# EAGLE board Memory Board (EAGLE 7.4.0)
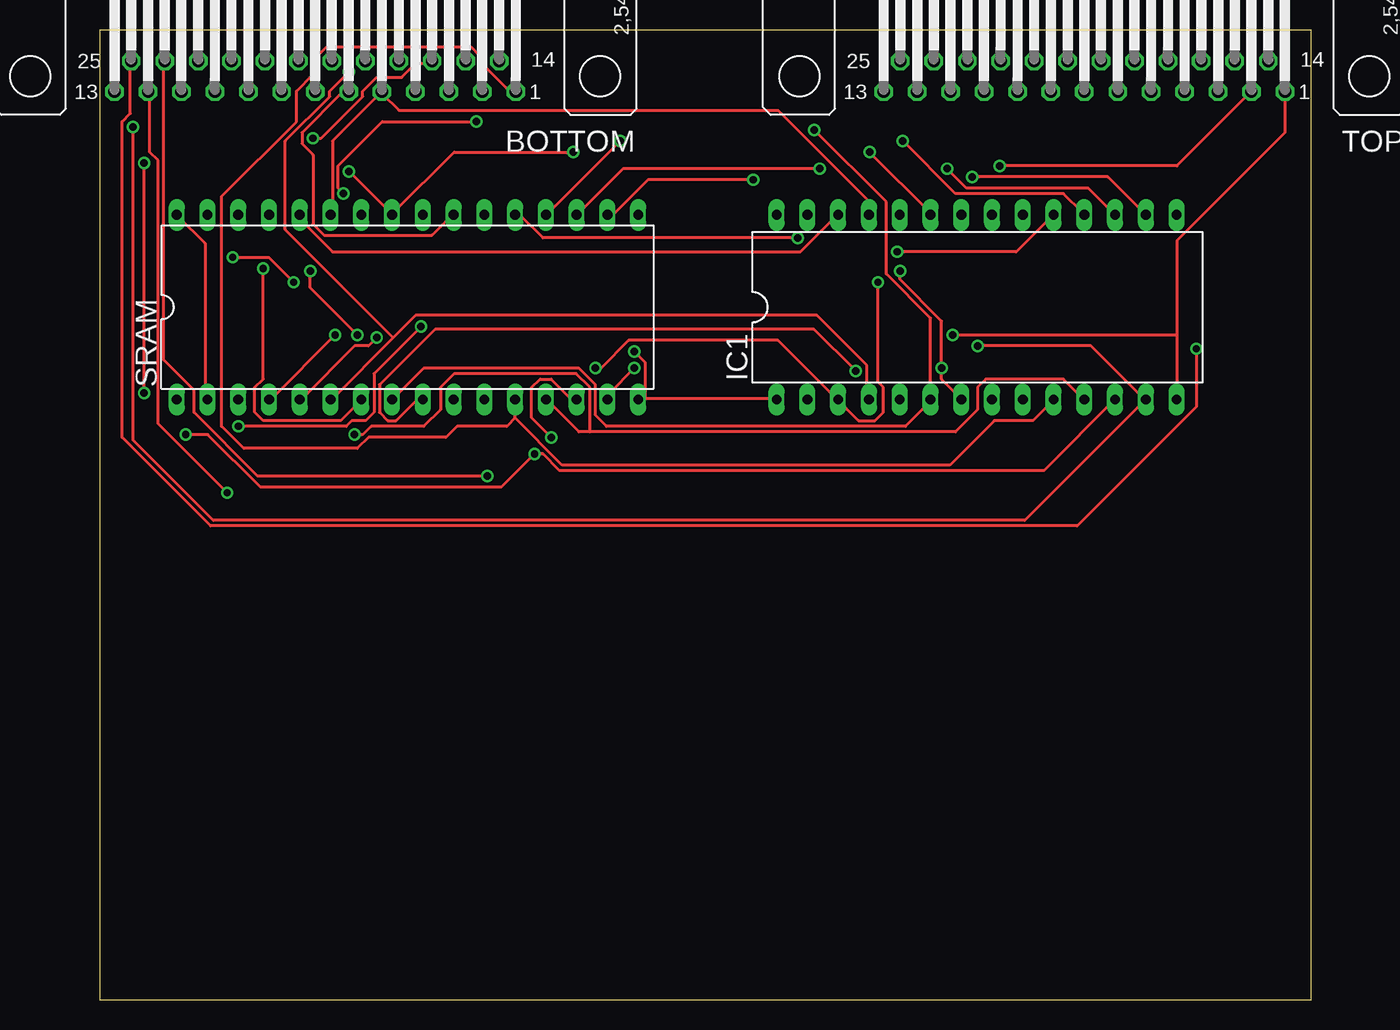
[diagram p0: board, top side]
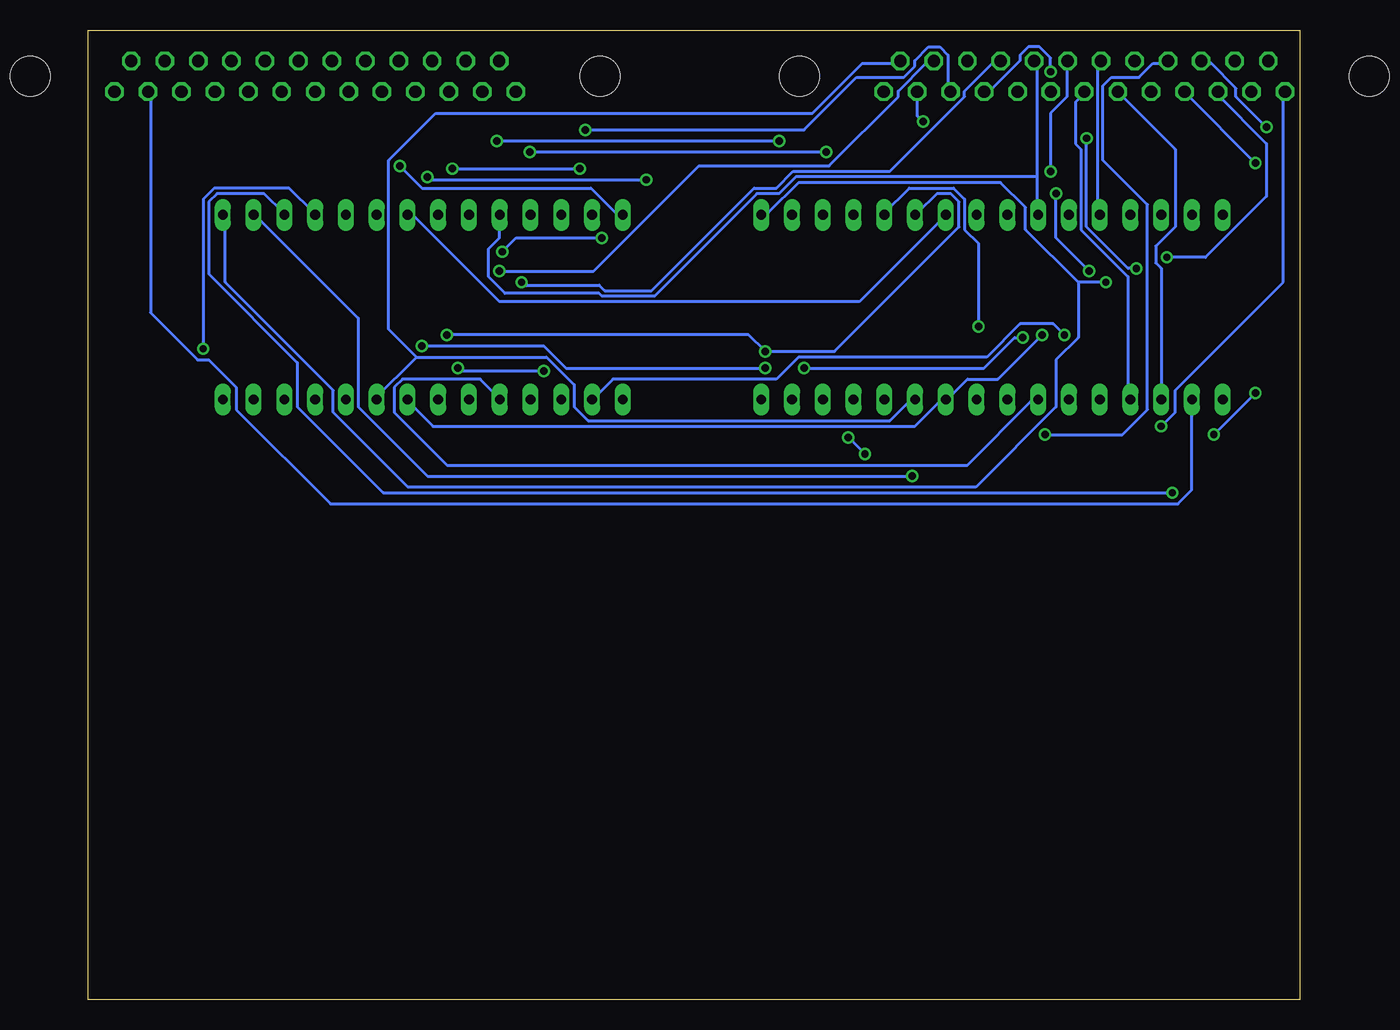
[diagram p1: board, bottom side, seen from below]

Size 100 x 80 mm. Coordinates in mm from the lower left corner, seen from the top.
Outline: 0,0 100,0 100,80 0,80 0,0
Copper layers (1*16): Top 0.035mm / dielectric 1.5mm / Bottom 0.035mm
Design rules "default": minimum track width 10mil, minimum drill 24mil, track to track 8mil, track to pad 8mil, pad to pad 8mil, via to via 8mil, smd to smd 8mil, copper to edge 40mil, drill to drill 8mil, minimum pad ring 10mil, minimum via ring 8mil, stop-mask expansion 4mil, vias tented up to drill 0mil, thermal gap 10mil

## Footprints (pad centres in the part's own frame; a part is rotated, then mirrored left to right if it is on the bottom)
M25H = drill 1.016 octagon: 1 -16.561,1.27; 2 -13.792,1.27; 3 -11.049,1.27; 4 -8.28,1.27; 5 -5.512,1.27; 6 -2.769,1.27; 7 0,1.27; 8 2.769,1.27; 9 5.512,1.27; 10 8.28,1.27; 11 11.049,1.27; 12 13.792,1.27; 13 16.561,1.27; 14 -15.189,-1.27; 15 -12.421,-1.27; 16 -9.652,-1.27; 17 -6.909,-1.27; 18 -4.14,-1.27; 19 -1.372,-1.27; 20 1.372,-1.27; 21 4.14,-1.27; 22 6.909,-1.27; 23 9.652,-1.27; 24 12.421,-1.27; 25 15.189,-1.27 | hole 3.302: 23.52,0; -23.52,0
DIL28-6 = drill 0.813 long: 1 -16.51,-7.62; 2 -13.97,-7.62; 3 -11.43,-7.62; 4 -8.89,-7.62; 5 -6.35,-7.62; 6 -3.81,-7.62; 7 -1.27,-7.62; 8 1.27,-7.62; 9 3.81,-7.62; 10 6.35,-7.62; 11 8.89,-7.62; 12 11.43,-7.62; 13 13.97,-7.62; 14 16.51,-7.62; 15 16.51,7.62; 16 13.97,7.62; 17 11.43,7.62; 18 8.89,7.62; 19 6.35,7.62; 20 3.81,7.62; 21 1.27,7.62; 22 -1.27,7.62; 23 -3.81,7.62; 24 -6.35,7.62; 25 -8.89,7.62; 26 -11.43,7.62; 27 -13.97,7.62; 28 -16.51,7.62
DIL32 = drill 0.813 long: 1 -19.05,-7.62; 2 -16.51,-7.62; 3 -13.97,-7.62; 4 -11.43,-7.62; 5 -8.89,-7.62; 6 -6.35,-7.62; 7 -3.81,-7.62; 8 -1.27,-7.62; 9 1.27,-7.62; 10 3.81,-7.62; 11 6.35,-7.62; 12 8.89,-7.62; 13 11.43,-7.62; 14 13.97,-7.62; 15 16.51,-7.62; 16 19.05,-7.62; 17 19.05,7.62; 18 16.51,7.62; 19 13.97,7.62; 20 11.43,7.62; 21 8.89,7.62; 22 6.35,7.62; 23 3.81,7.62; 24 1.27,7.62; 25 -1.27,7.62; 26 -3.81,7.62; 27 -6.35,7.62; 28 -8.89,7.62; 29 -11.43,7.62; 30 -13.97,7.62; 31 -16.51,7.62; 32 -19.05,7.62

## Placement (x,y rotation side)
BOTTOM  [M25H]  17.78,76.2 180 top
IC1  27C128P  [DIL28-6]  72.39,57.15 0 top
SRAM  [DIL32]  25.4,57.15 0 top
TOP  [M25H]  81.28,76.2 180 top

## Library data of the parts
BOTTOM TOP = con-subd; OC_FARNELL: unknown; OC_NEWARK: unknown
IC1 = microchip; OC_FARNELL: unknown; OC_NEWARK: unknown
SRAM = ic-package

## Nets
+5: IC1.28 SRAM.2 SRAM.32 TOP.2
+12: TOP.3
-5: TOP.15
-12: TOP.16
/IRQ0: TOP.4
/IRQ1: TOP.17
/MR: SRAM.24
/MW: SRAM.29
A0: BOTTOM.1 IC1.10 SRAM.12
A1: BOTTOM.14 IC1.9 SRAM.11
A2: BOTTOM.2 IC1.8 SRAM.10
A3: BOTTOM.15 IC1.7 SRAM.9
A4: BOTTOM.3 IC1.6 SRAM.8
A5: BOTTOM.16 IC1.5 SRAM.7
A6: BOTTOM.4 IC1.4 SRAM.6
A7: BOTTOM.17 IC1.3 SRAM.5
A8: BOTTOM.5 IC1.25 SRAM.27
A9: BOTTOM.18 IC1.24 SRAM.26
A10: BOTTOM.6 IC1.21 SRAM.23
A11: BOTTOM.19 IC1.23 SRAM.25
A12: BOTTOM.7 IC1.2 SRAM.4
A13: BOTTOM.20 IC1.26 SRAM.28
A14: BOTTOM.8 SRAM.3
A15: BOTTOM.21
CLK: TOP.14
D0: BOTTOM.22 IC1.11 SRAM.13
D1: BOTTOM.10 IC1.12 SRAM.14
D2: BOTTOM.23 IC1.13 SRAM.15
D3: BOTTOM.11 IC1.15 SRAM.17
D4: BOTTOM.24 IC1.16 SRAM.18
D5: BOTTOM.12 IC1.17 SRAM.19
D6: BOTTOM.25 IC1.18 SRAM.20
D7: BOTTOM.13 IC1.19 SRAM.21
DECODE_A15: SRAM.31
GND: IC1.1 IC1.14 SRAM.16 SRAM.22 TOP.1
N$16: SRAM.1
SRAM_CS2: SRAM.30

## Tracks (layer width: path | path; a pad name or v marks a point on that pad's centre or on a via)
+5  (via drill 0.61)
  Top 0.254: SRAM.2 8.69,49.61 8.69,62.41 6.4,64.69 SRAM.32 | v74.3,68.81 88.92,68.81 94.87,74.75 TOP.2
  Bottom 0.254: v74.3,68.81 72.47,66.98 58.52,66.98 56.46,64.92 56.01,64.92 IC1.28 | SRAM.2 8.91,49.38 8.91,42.06 10.06,40.92 80.01,40.92 87.78,48.69 87.78,50.52 90.07,52.81 90.98,52.81 94.87,56.69 94.87,74.75 TOP.2
A0
  Top 0.254: 34.29,48.01 SRAM.12 | 34.29,48.01 38.18,44.12 70.18,44.12 73.84,47.78 77.04,47.78 78.64,49.38 IC1.10 | 34.29,48.01 33.6,47.32 29.49,47.32 28.57,46.41 22.17,46.41 21.26,45.49 11.89,45.49 10.06,47.32 10.06,66.29 16.23,72.47 16.23,74.98 17.6,76.35 17.6,77.5 18.75,78.64 30.63,78.64 31.32,77.95 31.32,77.5 33.83,74.98 34.29,74.98 BOTTOM.1
A1
  Bottom 0.254: 72.92,53.03 62.18,53.03 59.89,50.75 59.89,48.92 58.75,47.78 33.83,47.78 32.23,49.38 31.77,49.38 SRAM.11 | 72.92,53.03 76.35,49.61 IC1.9 | 72.92,53.03 75.21,55.32 75.21,69.27 71.32,73.15 40.23,73.15 36.12,77.27 33.15,77.27 BOTTOM.14
A2  (via drill 0.61)
  Top 0.254: v31.09,72.47 23.32,72.47 19.66,68.81 19.66,66.98 v20.12,66.52 | v17.37,60.12 17.37,58.75 v21.26,54.86
  Bottom 0.254: IC1.8 73.61,49.38 71.55,47.32 31.77,47.32 29.72,49.38 29.26,49.38 SRAM.10 29.03,49.61 27.43,51.21 24.92,51.21 v21.26,54.86 | v31.09,72.47 31.55,72.92 31.55,74.75 BOTTOM.2 | v20.12,66.52 20.12,62.87 v17.37,60.12
A3  (via drill 0.61)
  Top 0.254: v62.41,51.89 58.98,55.32 27.66,55.32 23.09,50.75 23.09,48.46 23.77,47.78 24.46,47.78 26.06,49.38 26.52,49.38 SRAM.9 | IC1.7 71.09,49.61 69.49,51.21 v69.49,52.12 69.49,56.01 66.06,59.44 v66.06,60.12
  Bottom 0.254: v62.41,51.89 69.27,51.89 v69.49,52.12 | v66.06,60.12 58.29,60.12 49.61,68.81 38.86,68.81 33.15,74.52 33.15,74.98 30.86,77.27 30.4,77.27 BOTTOM.15
A4  (via drill 0.61)
  Top 0.254: SRAM.8 24.23,49.61 26.75,52.12 39.55,52.12 40.92,50.75 40.92,48.23 41.83,47.32 66.52,47.32 68.58,49.38 IC1.6 68.58,56.24 64.92,59.89 64.92,65.84 v58.98,71.78
  Bottom 0.254: v58.98,71.78 40.92,71.78 36.58,76.12 32.69,76.12 31.77,77.04 31.77,77.5 30.63,78.64 29.72,78.64 29.03,77.95 29.03,74.98 BOTTOM.3
A5  (via drill 0.61)
  Top 0.254: v17.6,71.09 18.29,71.09 21.72,74.52 21.72,74.98 22.86,76.12 24.92,76.12 26.06,77.27 27.43,77.27 BOTTOM.16 | v13.49,60.35 13.49,51.21 12.8,50.52 12.8,48.46 13.49,47.78 19.89,47.78 21.49,49.38 SRAM.7
  Bottom 0.254: SRAM.7 21.72,49.38 22.17,49.38 27.43,44.12 70.41,44.12 74.75,48.46 74.75,50.52 74.07,51.21 67.67,51.21 66.06,49.61 IC1.5 | v17.6,71.09 17.6,63.78 14.17,60.35 v13.49,60.35
A6  (via drill 0.61)
  Top 0.254: 24.23,54.63 26.06,56.46 59.21,56.46 63.32,52.35 63.32,49.61 IC1.4 | 24.23,54.63 19.2,49.61 SRAM.6 | v20.57,76.58 18.97,74.98 18.97,74.52 15.32,70.87 15.32,63.55 24.23,54.63
  Bottom 0.254: v20.57,76.58 20.57,77.72 21.49,78.64 22.4,78.64 23.09,77.95 23.09,77.5 25.6,74.98 26.06,74.98 BOTTOM.4
A7  (via drill 0.61)
  Top 0.254: v22.86,54.63 22.17,53.95 21.03,53.95 16.69,49.61 SRAM.5 | v40.92,52.12 41.38,52.12 43.66,54.41 56.01,54.41 60.81,49.61 IC1.3 61.04,49.38 62.64,47.78 64.01,47.78 64.69,48.46 64.69,50.52 64.24,50.98 v64.24,59.21
  Bottom 0.254: v22.86,54.63 23.55,54.63 26.06,52.12 v40.92,52.12 | v64.24,59.21 64.01,58.98 57.84,58.98 57.38,58.52 53.49,58.52 45.03,66.98 43.2,66.98 41.83,68.35 33.83,68.35 27.66,74.52 27.66,74.98 25.38,77.27 24.69,77.27 BOTTOM.17
A8
  Top 0.254: SRAM.27 19.2,64.92 19.2,70.87 23.09,74.75 BOTTOM.5 23.32,74.75 24.69,73.38 56.01,73.38 63.32,66.06 63.32,64.92 IC1.25
A9
  Bottom 0.254: 21.72,67.89 21.72,77.27 BOTTOM.18 | 21.72,67.89 21.72,64.92 SRAM.26 | 21.72,67.89 41.6,67.89 42.98,66.52 44.81,66.52 53.26,58.06 57.61,58.06 57.84,58.29 65.61,58.29 66.98,59.66 66.98,61.95 66.06,62.87 66.06,64.69 IC1.24
A10
  Top 0.254: SRAM.23 29.03,64.69 27.43,63.09 18.52,63.09 17.6,64.01 17.6,69.72 16.69,70.64 16.69,71.55 19.89,74.75 20.34,74.75 BOTTOM.6
  Bottom 0.254: IC1.21 73.61,64.69 73.15,64.69 66.06,57.61 36.35,57.61 29.26,64.69 SRAM.23
A11  (via drill 0.61)
  Top 0.254: v20.57,68.35 24,64.92 SRAM.25 24.23,64.92 29.26,69.95 v39.09,69.95 | v63.55,69.95 68.58,64.92 IC1.23
  Bottom 0.254: v20.57,68.35 20.57,73.15 19.2,74.52 19.2,77.27 BOTTOM.19 | v39.09,69.95 v63.55,69.95
A12  (via drill 0.61)
  Top 0.254: v19.43,54.86 14.17,49.61 SRAM.4
  Bottom 0.254: SRAM.4 14.17,49.61 14.17,59.66 18.06,63.55 18.06,70.18 18.52,70.64 18.52,74.07 17.83,74.75 BOTTOM.7 | v19.43,54.86 20.34,55.78 23.09,55.78 25.83,53.03 41.38,53.03 43.2,51.21 56.69,51.21 58.29,49.61 IC1.2
A13
  Top 0.254: IC1.26 60.81,64.69 57.84,61.72 19.2,61.72 16.69,64.24 16.69,64.69 SRAM.28
  Bottom 0.254: SRAM.28 16.69,64.92 16.69,77.04 16.46,77.27 BOTTOM.20
A14
  Bottom 0.254: SRAM.3 11.43,60.35 11.89,60.81 11.89,62.18 10.29,63.78 10.29,70.18 14.86,74.75 BOTTOM.8
D0  (via drill 0.61)
  Top 0.254: 40.46,46.86 70.64,46.86 72.47,48.69 72.47,50.52 73.15,51.21 79.55,51.21 81.15,49.61 IC1.11 | 40.46,46.86 39.55,46.86 37.03,49.38 SRAM.13 | v21.03,46.63 21.72,46.63 22.4,47.32 26.75,47.32 28.12,48.69 28.12,50.52 29.26,51.66 39.32,51.66 40.46,50.52 40.46,46.86
  Bottom 0.254: v21.03,46.63 14.63,46.63 12.57,48.69 12.57,65.61 16.23,69.27 16.23,75.44 15.54,76.12 13.26,76.12 12.12,77.27 10.97,77.27 BOTTOM.22
D1  (via drill 0.61)
  Top 0.254: v37.26,46.41 35.66,48.01 35.66,50.52 36.35,51.21 37.26,51.21 38.86,49.61 39.32,49.61 SRAM.14 | IC1.12 77.95,43.66 37.95,43.66 36.58,45.03 v35.89,45.03 33.15,42.29 13.26,42.29 8.91,46.63 v7.09,46.63 | v3.66,50.06 v3.66,69.04
  Bottom 0.254: v35.89,45.03 v37.26,46.41 | v3.66,69.04 9.37,74.75 BOTTOM.10 | v7.09,46.63 v3.66,50.06
D2  (via drill 0.61)
  Top 0.254: v44.12,52.12 42.06,50.06 42.06,49.61 SRAM.15 | v72.47,53.95 81.84,53.95 86.18,49.61 IC1.13 86.18,49.38 76.35,39.55 9.37,39.55 2.74,46.18 v2.74,72.01
  Bottom 0.254: v44.12,52.12 60.58,52.12 62.41,53.95 v72.47,53.95 | v2.74,72.01 5.26,74.52 5.26,75.21 7.32,77.27 8,77.27 BOTTOM.23
D3  (via drill 0.61)
  Top 0.254: v16,59.21 13.95,61.27 v10.97,61.27
  Bottom 0.254: 18.29,59.21 22.63,63.55 22.63,65.38 24.69,67.44 41.38,67.44 43.89,64.92 44.35,64.92 SRAM.17 | v16,59.21 18.29,59.21 | v10.97,61.27 7.77,61.27 2.74,66.29 2.74,70.64 6.86,74.75 BOTTOM.11 | 18.29,59.21 18.29,54.63 20.12,52.81 20.12,48.92 26.75,42.29 73.61,42.29 79.78,48.46 79.78,50.29 88.7,59.21 88.7,64.69 IC1.15
D4  (via drill 0.61)
  Top 0.254: v53.95,67.67 45.26,67.67 42.52,64.92 42.06,64.92 SRAM.18 | v72.01,67.89 83.21,67.89 86.18,64.92 IC1.16 | v32,43.2 13.03,43.2 7.77,48.46 7.77,50.29 5.26,52.81 5.26,77.27 BOTTOM.24
  Bottom 0.254: v53.95,67.67 71.78,67.67 v72.01,67.89 | v32,43.2 72.01,43.2 77.72,48.92 77.72,56.24 86.18,64.69 IC1.16
D5  (via drill 0.61)
  Top 0.254: v59.44,68.58 43.2,68.58 39.55,64.92 SRAM.19 | v69.95,68.58 71.55,66.98 81.61,66.98 IC1.17 | v10.52,41.83 4.8,47.55 4.8,69.27 4.12,69.95 4.12,74.75 BOTTOM.12
  Bottom 0.254: v69.95,68.58 v59.44,68.58 | v10.52,41.83 75.67,41.83 82.75,48.92 82.75,52.58 90.07,59.89 90.07,65.84 89.38,66.52 85.5,66.52 83.9,64.92 IC1.17
D6  (via drill 0.61)
  Top 0.254: v42.98,70.87 37.03,64.92 SRAM.20 | v66.29,70.87 70.64,66.52 79.55,66.52 81.15,64.92 IC1.18 | v90.53,53.72 90.53,48.92 80.7,39.09 9.14,39.09 1.83,46.41 1.83,72.47 2.52,73.15 2.52,77.27 BOTTOM.25
  Bottom 0.254: v66.29,70.87 v42.98,70.87 | v90.53,53.72 90.53,66.06 89.61,66.98 83.44,66.98 81.38,64.92 IC1.18
D7  (via drill 0.61)
  Top 0.254: v57.61,62.87 36.58,62.87 34.75,64.69 34.29,64.69 SRAM.21 | v65.84,61.72 75.67,61.72 78.64,64.69 IC1.19 | v11.43,47.32 20.34,47.32 20.8,47.78 21.95,47.78 22.63,48.46 22.63,51.66 v26.52,55.55
  Bottom 0.254: v57.61,62.87 64.69,62.87 v65.84,61.72 | v11.43,47.32 10.29,48.46 10.29,50.29 1.37,59.21 1.37,74.75 BOTTOM.13 | v26.52,55.55 26.52,62.41 27.66,63.55 27.66,66.06 28.57,66.98 32.23,66.98 34.29,64.92 SRAM.21
GND  (via drill 0.61)
  Top 0.254: 88.92,54.86 88.92,62.64 97.84,71.55 TOP.1 | 88.92,54.86 88.92,49.61 IC1.14 | 45.03,49.61 55.78,49.61 IC1.1 | 45.03,49.61 44.58,49.61 SRAM.16 45.03,49.61 | v44.12,53.49 45.03,52.58 45.03,49.61 | v70.41,54.86 88.92,54.86
  Bottom 0.254: SRAM.22 31.55,64.92 29.95,66.52 28.8,66.52 28.12,65.84 28.12,63.78 38.41,53.49 v44.12,53.49 45.49,54.86 v70.41,54.86